# EAGLE board ear-o_board (EAGLE 8.4.3)
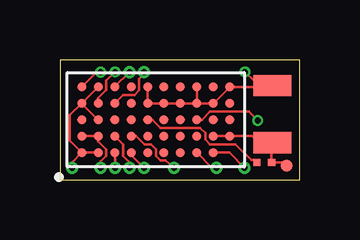
[diagram p0: board, top side]
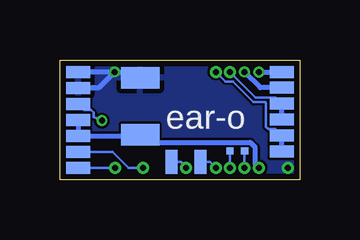
[diagram p1: board, bottom side, seen from below]

Size 10 x 5 mm. Coordinates in mm from the lower left corner, seen from the top.
Outline: 0,0 10,0 10,5 0,5 0,0
Copper layers (1+2*3+16): Top 0.012mm / dielectric 0.36mm / Route2 0.018mm / dielectric 0.71mm / Route3 0.018mm / dielectric 0.36mm / Bottom 0.012mm
Design rules "eC_4Layer_PClass9_BaseCopperO12-I18 *": minimum track width 0.1mm, minimum drill 0.1mm, track to track 0.1mm, track to pad 0.1mm, pad to pad 0.1mm, via to via 0.1mm, smd to smd 0mil, copper to edge 0.25mm, drill to drill 0.35mm, minimum pad ring 0.15mm, minimum via ring 0.1mm, stop-mask expansion 0mil, vias tented up to drill 0.45mm, thermal gap 0.2mm

## Footprints (pad centres in the part's own frame; a part is rotated, then mirrored left to right if it is on the bottom)
1206 = smd 0.889 x 1.6: P$1 -1.194,0; P$2 1.194,0
0201 = smd 0.305 x 0.305: P$1 0.305,0; P$2 -0.305,0
TEST-PAD-0.2 = smd 0.508 x 0.508: P 0,0
BGA49C69P10X5_739X394X178 = smd 0.37 x 0.37: A1 -3.087,-1.372; A2 -2.401,-1.372; A3 -1.715,-1.372; A4 -1.029,-1.372; A5 -0.343,-1.372; A6 0.343,-1.372; A7 1.029,-1.372; A8 1.715,-1.372; A9 2.401,-1.372; B1 -3.087,-0.686; B2 -2.401,-0.686; B3 -1.715,-0.686; B4 -1.029,-0.686; B5 -0.343,-0.686; B6 0.343,-0.686; B7 1.029,-0.686; B8 1.715,-0.686; B9 2.401,-0.686; B10 3.087,-0.686; C1 -3.087,0; C2 -2.401,0; C3 -1.715,0; C4 -1.029,0; C5 -0.343,0; C6 0.343,0; C7 1.029,0; C8 1.715,0; C9 2.401,0; C10 3.087,0; D1 -3.087,0.686; D2 -2.401,0.686; D3 -1.715,0.686; D4 -1.029,0.686; D5 -0.343,0.686; D6 0.343,0.686; D7 1.029,0.686; D8 1.715,0.686; D9 2.401,0.686; D10 3.087,0.686; E1 -3.087,1.372; E2 -2.401,1.372; E3 -1.715,1.372; E4 -1.029,1.372; E5 -0.343,1.372; E6 0.343,1.372; E7 1.029,1.372; E8 1.715,1.372; E9 2.401,1.372; E10 3.087,1.372
SINGLE-PAD = smd 1 x 0.5: P$1 0,0

## Placement (x,y rotation side)
C1  220 uF  [1206]  6.65,3.06 270 bottom
C3  2.2 uF  [0201]  2.6,1.2 180 bottom
C6  220 uF  [1206]  8.86,2.73 270 top
R1  12ohm  [0201]  8.53,0.72 180 top
TP1  [TEST-PAD-0.2]  9.46,0.59 0 top
U1  E7150-102A49-AG  [BGA49C69P10X5_739X394X178]  4,2.5 0 top
U$1  SINGLE-PAD  [SINGLE-PAD]  9.25,2.5 0 bottom
U$2  SINGLE-PAD  [SINGLE-PAD]  9.25,1.83 0 bottom
U$3  SINGLE-PAD  [SINGLE-PAD]  0.75,1.17 180 bottom
U$4  SINGLE-PAD  [SINGLE-PAD]  0.75,3.83 0 bottom
U$5  SINGLE-PAD  [SINGLE-PAD]  0.75,2.5 180 bottom
U$6  SINGLE-PAD  [SINGLE-PAD]  0.75,1.84 180 bottom
U$7  SINGLE-PAD  [SINGLE-PAD]  0.75,4.5 0 bottom
U$8  SINGLE-PAD  [SINGLE-PAD]  0.75,3.17 180 bottom
U$9  SINGLE-PAD  [SINGLE-PAD]  9.24,3.83 0 bottom
U$10  SINGLE-PAD  [SINGLE-PAD]  9.25,1.17 0 bottom
U$11  SINGLE-PAD  [SINGLE-PAD]  9.25,0.5 0 bottom
U$12  SINGLE-PAD  [SINGLE-PAD]  9.25,4.5 180 bottom
U$13  SINGLE-PAD  [SINGLE-PAD]  9.25,3.17 0 bottom
U$14  SINGLE-PAD  [SINGLE-PAD]  4.14,0.75 90 bottom
U$15  SINGLE-PAD  [SINGLE-PAD]  5.35,0.75 90 bottom

## Library data of the parts
C1 C3 C6 R1 TP1 U$1-U$15 = my-parts-v1
U1 = E7150-102A49-AG; MANUFACTURER: ON Semiconductor

## Nets
1.4V: C1.P$2 U1.B1 U1.B2 U$1.P$1 U$2.P$1
GND: C1.P$1 C6.P$1 U1.A1 U1.A2 U1.C2 U1.D1 U1.D5 U1.D6 U1.D7 U1.D8 U1.D9 U1.E2 U1.E5 U1.E8 U1.E10 U$9.P$1 U$12.P$1
MIC1S: U1.D2 U$4.P$1
MIC2S: U1.E1 U$7.P$1
MIC-N: U1.D3 U$3.P$1 U$6.P$1
MIC-P: U1.E3 U$5.P$1 U$8.P$1
N$1: U1.C8 U$13.P$1
N$3: R1.P$1 U1.C5
N$10: C3.P$2 U1.A3
N$13: C3.P$1 U1.B3
RCVR0N: U1.A4 U$14.P$1
RCVR0P: U1.B4 U$15.P$1
RF_AVDD: U1.D10
RF_VDD: U1.C10
SCL: U1.A9 U$11.P$1
SDA: U1.A8 U$10.P$1
VDBL: C6.P$2 R1.P$2 TP1.P U1.B9 U1.B10
VDDPA: U1.E9
VREG: U1.C1

## Tracks (layer width: path | path; a pad name or v marks a point on that pad's centre or on a via)
1.4V  (via drill 0.25 pad 0.5)
  Top 0.1: U1.B1 U1.B2 1.6,1.6 1.93,1.27 1.93,0.99 1.7,0.76 v1.7,0.5
  Bottom 0.1: 7,1.86 C1.P$2
  Bottom 0.2: v1.7,0.5 1.85,0.65 1.85,1.34 2.06,1.55 6.3,1.55 C1.P$2 | U$1.P$1 U$2.P$1 7.03,1.83 7,1.86
GND  (via drill 0.25 pad 0.25, 0.25 pad 0.5)
  Top 0.1: U1.E5 U1.D5 U1.D6 U1.D7 U1.D8 | U1.D8 U1.E8 | U1.D8 U1.D9 U1.E10 8.77,3.87 C6.P$1 8.45,3.8 v7.72,4.5 | U1.A1 0.41,1.63 0.41,2.69 U1.D1 | U1.D1 U1.C2 | U1.A2 U1.A1 | U1.A1 0.5,0.71 v0.5,0.5 | U1.E2 U1.D1
  Bottom 0.2: 8.13,4.09 v7.72,4.5 | v7.72,4.5 7.29,4.5 C1.P$1 | v7.72,4.5 | v7.72,4.5 U$12.P$1 | v7.72,4.5 8.39,3.83 U$9.P$1
  pour Bottom: -0.18,6.73 10.79,6.73 10.79,-0.82 -0.18,-0.82
MIC1S  (via drill 0.25 pad 0.25)
  Top 0.1: U1.D2 1.6,3.4 1.93,3.73 1.93,4.13 v2.3,4.5
  Bottom 0.2: U$4.P$1 1.64,3.83 v2.3,4.49 v2.3,4.5
MIC2S  (via drill 0.25 pad 0.25)
  Top 0.1: U1.E1 1.53,4.49 v1.7,4.49
  Bottom 0.2: v1.7,4.49 v1.69,4.5 U$7.P$1
MIC-N  (via drill 0.25 pad 0.5)
  Top 0.1: v3.5,4.5 3.5,4.4 3.31,4.21 3.31,3.73 3.11,3.54 2.64,3.54 U1.D3
  Bottom 0.1: v3.5,4.5 3.1,4.1 2.78,4.1 1.92,3.23 1.44,3.23 1.4,3.2 1.4,2.19 1.31,2.1 1.01,2.1 U$6.P$1
  Bottom 0.2: U$3.P$1 U$6.P$1
MIC-P  (via drill 0.25 pad 0.5)
  Top 0.1: U1.E3 2.29,3.88 v2.9,4.5
  Bottom 0.1: 0.75,3 U$8.P$1 1.01,3.44 1.83,3.44 v2.9,4.5
  Bottom 0.2: U$5.P$1 0.75,3
N$1  (via drill 0.25 pad 0.25)
  Top 0.1: U1.C8 5.93,2.5 6.26,2.83 7.88,2.83 v8.25,2.47
  Bottom 0.1: U$13.P$1 8.98,2.9 8.69,2.9 8.6,2.81 8.6,2.62 v8.25,2.47
N$3
  Top 0.1: R1.P$1 8.08,0.82 7.98,0.82 7.32,1.48 6.26,1.48 6.07,1.68 6.07,1.95 5.85,2.17 4.2,2.17 3.87,2.5 U1.C5
N$10  (via drill 0.25 pad 0.5)
  Top 0.1: v2.3,0.5 2.3,1.11 U1.A3
  Bottom 0.1: C3.P$2 | v2.3,0.5 C3.P$2
N$13  (via drill 0.25 pad 0.5)
  Top 0.1: U1.B3 2.64,1.46 2.64,0.99 2.9,0.72 v2.9,0.5
  Bottom 0.1: v2.9,0.5 C3.P$1
RCVR0N  (via drill 0.25 pad 0.5)
  Top 0.1: v3.5,0.5 2.97,1.03 U1.A4
  Bottom 0.1: v3.5,0.5 3.75,0.75 U$14.P$1
RCVR0P  (via drill 0.25 pad 0.5)
  Top 0.1: v4.75,0.5 4.41,0.79 4.2,0.79 4.01,0.99 4.01,1.25 3.8,1.46 3.53,1.46 3.18,1.81 U1.B4
  Bottom 0.1: U$15.P$1 4.95,0.75 v4.75,0.5
SCL  (via drill 0.25 pad 0.5)
  Top 0.1: v7.71,0.5 7.08,1.13 U1.A9
  Bottom 0.1: 9.03,0.47 U$11.P$1 9,0.53 8.97,0.5 v7.71,0.5
SDA  (via drill 0.25 pad 0.5)
  Top 0.1: U1.A8 6.34,0.5 v6.52,0.5
  Bottom 0.1: v6.52,0.5 7.14,0.5 7.81,1.17 U$10.P$1
VDBL
  Top 0.1: U1.B9 U1.B10 8,1.81 8.28,1.54 C6.P$2 8.83,1.51 R1.P$2 9.33,0.72 TP1.P

## Text on the board
bPlace: ear-o